# Altium PCB CPU.PcbDoc (part 2 of 2)
Units mm, origin at the board's own origin, x right, y up, seen from the top; angles counter-clockwise.
Board outline 103 x 60 mm, 2 copper layers (Top Layer, Bottom Layer), stack 0.904 mm thick; 128 components, 126 nets, 552 pads, 250 vias.
Unrouted connection lines stored in the file: 10.
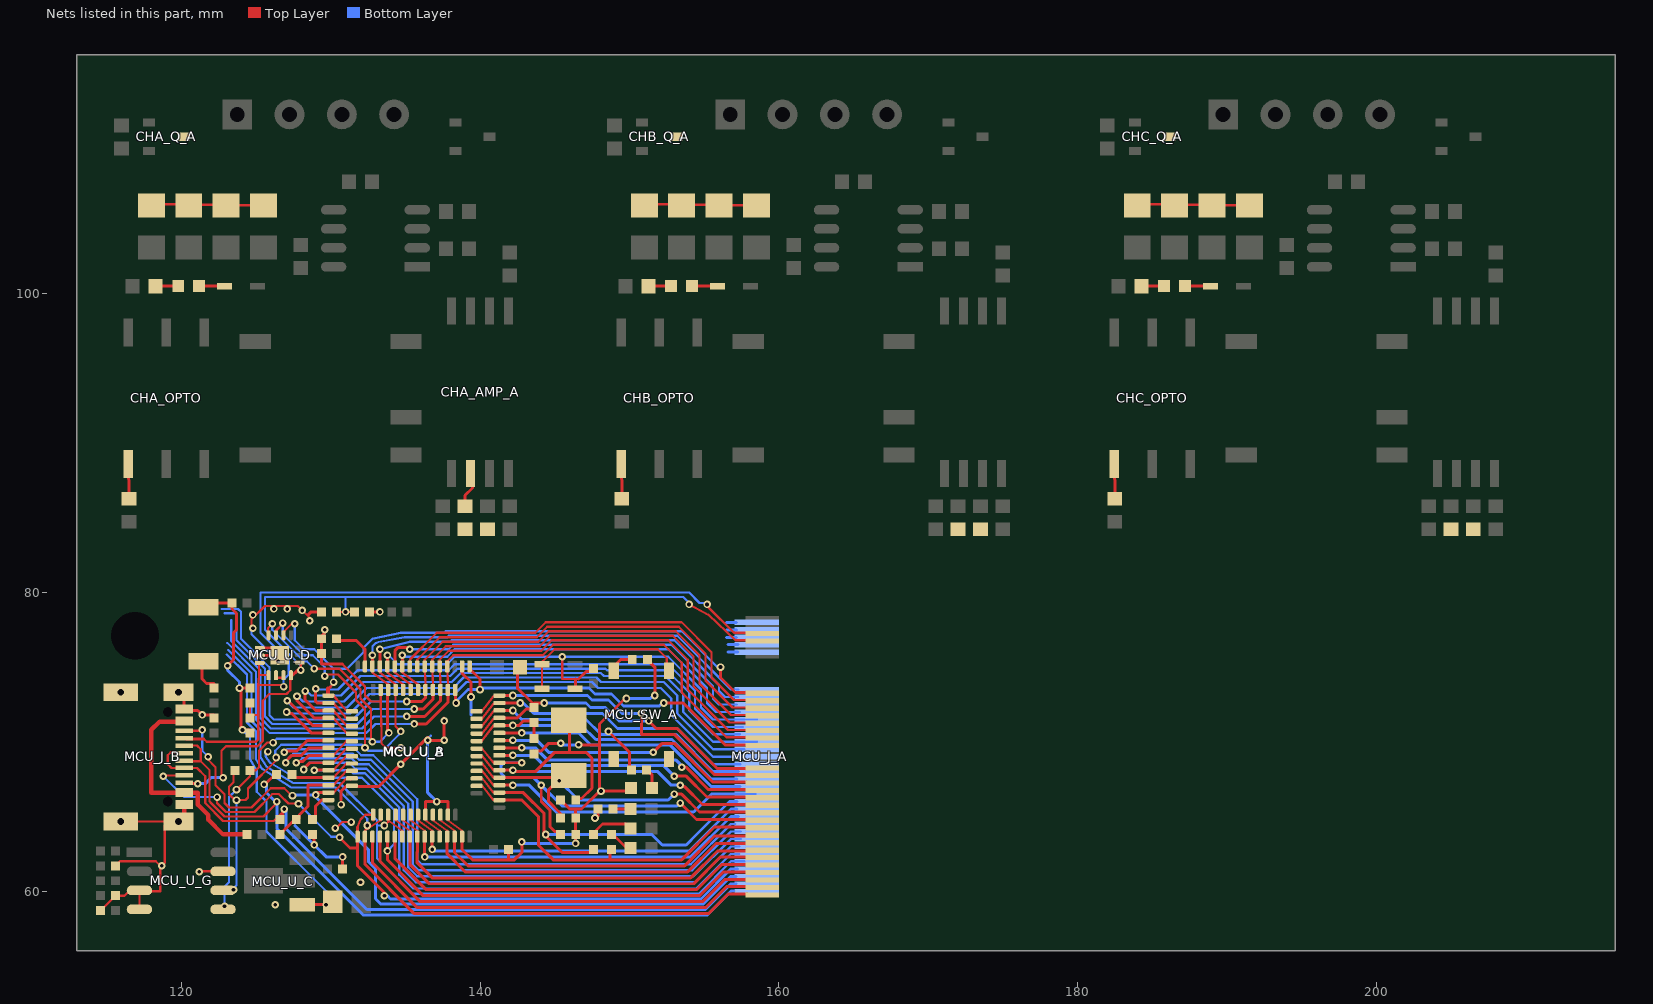
[diagram p2: the nets of this part, all layers, seen from the top]

## Via types
v1: diameter 0.508, hole 0.254, Top Layer to Bottom Layer, tented both sides, 250 vias

## Nets (pads, with @x,y where several pads share a name; then routed paths per layer and width w, separated by ;. In a path a pad name is that pad's centre, name@x,y a point inside that pad or via, vN(x,y) a via of type N, cw(c..) or ccw(c..) an arc to the next point about the centre after c; other vN are vias at no path point) (continued)
MCU_GND: MCU_C_A.2 MCU_C_B.2 MCU_C_C.2 MCU_C_D.2 MCU_C_E.2 MCU_C_G.1 MCU_C_H.1 MCU_C_I.2 MCU_C_K.2 MCU_C_L.1 MCU_C_M.2 MCU_C_N.2 MCU_C_P.1 MCU_C_R.1 MCU_D_C.2 MCU_J_A.2 MCU_J_A.4 MCU_J_A.6 MCU_J_A.8 MCU_J_A.10 MCU_J_B.0 MCU_J_B.A1_B12 MCU_J_B.A12_B1 MCU_LED_Y.1 MCU_R_A.2 MCU_R_C.1 MCU_R_I.2 MCU_R_J.2 MCU_R_M.2 MCU_R_N.2 MCU_U_A.18 MCU_U_A.60 MCU_U_A.63 MCU_U_B.23 MCU_U_B.35 MCU_U_B.44 MCU_U_B.47 MCU_U_C.1 MCU_U_D.0 MCU_U_D.8 MCU_U_D.9 MCU_U_G.3 MCU_U_G.4 MCU_U_G.7 | length 147.6
  Top Layer w0.15: MCU_C_P.1@114.7,58.8 115.6,59.7 MCU_R_M.2@115.608,59.7 116.2,59.7 MCU_U_G.3@116.6,60.1 ; MCU_R_N.2@115.608,61.7 115.908,62 118.3,62 118.6,61.7 118.6,60 MCU_U_G.3@117.6,60 ; MCU_J_B.0@115.957,64.67 119.77,64.67 MCU_J_B.0@120,64.9 ; MCU_U_G.4@117.2,58.9 MCU_U_G.3@117.2,60.06 ; v1(118.7,61.7) 118.9,61.9 MCU_J_B.0@118.9,64.4 ; v1@121.23,61.33 MCU_U_G.7@122.8,61.33 ; v1@124.7,77.6 124.7,78.2 125.6,79.1 127.8,79.1 v1(128.1,78.8) 128.6,78.3 v1(128.6,78.1) ; v1@130.287,64.142 130.774,64.629 v1(131.381,64.629) ; 130.8,75.2 132.3,73.7 132.3,73.1 132.7,72.7 133.35,72.7 ; MCU_U_B.23@133.35,73.475 133.35,72.7 ; 133.398,70.5 133.398,69.902 133.7,69.6 v1(134.7,69.6) ; 133.4,70.4 133.4,70.402 133.35,72.7 ; MCU_U_B.44@136.35,64.75 MCU_U_A.60@137.3,64.05 ; MCU_U_B.47@137.85,64.75 MCU_U_A.63@138.8,64.05
  Top Layer w0.2: MCU_J_B.A1_B12@120.197,72.1 120.197,73.097 MCU_J_B.0@120.3,73.2 ; MCU_J_B.A1_B12@120.3,72.1 121.1,72.1 v1@121.392,71.808 ; v1@121.3,71.8 121.308,71.808 v1@121.392,71.808 ; v1(121.4,71.8) v1@121.392,71.808 ; MCU_D_C.2@121.4,79.2 121.5,79.3 MCU_C_K.2@123.392,79.3 ; MCU_C_I.2@122.2,71.808 v1@121.392,71.808 ; v1(123.1,75.1) 123.5,75.5 123.5,77.3 123.7,77.5 123.7,78.6 123.4,78.9 MCU_C_K.2@123.4,79.1 ; MCU_C_K.2@123.392,79.1 MCU_C_K.2@123.4,79.1 ; MCU_C_K.2@123.4,79.2 MCU_C_K.2@123.4,79.1 ; MCU_C_N.2@124.6,70.8 MCU_C_N.2@124.6,70.7 ; MCU_R_I.2@124.6,73.808 124.6,73.708 124.6,73.6 124,73.6 124,70.8 v1(124.1,70.8) 124.5,70.8 MCU_C_N.2@124.6,70.7 ; MCU_U_D.8@125.085,76.279 MCU_U_D.8@125.275,76.279 126.521,76.279 MCU_U_D.0@126.6,76.2 ; MCU_U_D.9@125.275,75.779 126.421,75.779 MCU_U_D.0@126.5,75.7 ; MCU_U_C.1@127.8,59.1 v1(129.7,59.1) ; 128.5,78.5 128.7,78.7 MCU_R_J.2@129.392,78.7 ; MCU_C_E.2@128.7,63.692 128.9,63.492 v1(128.9,63.1) ; MCU_C_D.2@129.392,76.9 129.392,77.092 v1@129.6,77.3 ; MCU_C_D.2@129.4,76.9 129.4,75.2 130.8,75.2 ; MCU_C_L.1@129.7,58.8 129.9,59 MCU_C_L.1@129.9,59.1 ; 130.7,66.1 130.7,66.7 131.05,67.05 MCU_U_B.35@131.425,67.05 ; MCU_C_A.2@130.8,61.6 v1(130.8,62.3) ; MCU_U_B.35@131.4,67 133.2,67 v1(134.7,68.5) 136.5,70.3 v1@136.7,70.1 ; MCU_C_M.2@132.508,78.7 MCU_C_M.2@132.608,78.7 v1@133.2,78.7 ; MCU_U_B.44@136.35,65.3 136.35,66 v1(137.1,66) 137.85,66 MCU_U_B.47@137.85,65.125 ; v1(136.5,70.1) v1@136.7,70.1 ; MCU_U_A.63@138.8,63.65 138.8,62.8 139.5,62.1 141.9,62.1 ; MCU_U_A.18@138.8,75.05 138.8,74.6 139.4,74 v1@139.4,73.2 ; MCU_C_C.2@141.908,62.8 141.9,62.792 141.9,62.1 ; v1(142.8,63.3) 142.8,62.6 142.3,62.1 141.9,62.1 ; MCU_R_C.1@143.6,69.392 144.092,69.392 144.6,69.9 v1(145.4,69.9) ; MCU_C_H.1@145.5,66.1 145.5,66 146,65.5 146.4,65.5 ; v1(146.4,63.2) 146.4,64.5 146.408,64.5 ; MCU_C_G.1@146.4,65 146.4,65.5 ; 146.408,64.1 146.408,64.5 ; MCU_C_G.1@146.408,65.108 MCU_C_G.1@146.408,64.9 146.408,64.5 ; v1@146.5,69.8 v1(146.6,69.8) 148,69.8 ; v1(148.1,66.7) MCU_LED_Y.1@150,66.7 ; v1@149.8,73 148,71.2 148,69.8 ; MCU_R_A.2@151.2,75.5 151.7,75 v1(151.7,73.1) ; MCU_C_N.2@124.6,70.7 124.604,70.696 124.6,70.692 MCU_C_N.2@124.6,70.7 ; v1@136.7,70.1 v1(137.6,70.1) v1(137.6,71.4) ; v1(137.6,71.4) 137.6,71.6 137.5,71.5 v1(137.6,71.4) ; 146.4,65.5 146.8,65.5 148,66.7 148,69.8
  Top Layer w0.3: MCU_J_B.A12_B1@120.197,65.9 120.197,65.003 MCU_J_B.0@120.3,64.9
  Bottom Layer w0.15: v1(124.1,70.8) 124.6,70.3 124.6,68.836 125.05,68.1 125.05,66.65 125.7,66 125.7,64 129.7,60 v1(129.7,59.1) v1@129.7,59 ; v1@124.7,77.6 124.7,77.2 v1(126.5,75.4) ; 136.7,70.4 136.5,70.2 v1(136.5,70.1) v1(137.6,70.1)
  Bottom Layer w0.2: v1(123.1,75.1) 123.1,74.8 123.9,74 v1(123.9,73.6) ; 127.6,64.4 v1(128.9,63.1) 129.7,62.3 130.7,62.3 130.8,62.4 v1(130.8,62.3) ; v1(136.5,70.1) 136.5,66.6 v1(137.1,66) v1@137,65.9 ; 139.4,71.8 v1(139.4,73) ; v1(142.8,63.3) 142.9,63.2 v1(146.4,63.2) ; v1(145.4,69.9) 145.5,69.8 v1(146.6,69.8) ; v1(149.8,72.9) 151.4,72.9 v1@151.6,73.1 ; 156.503,77 MCU_J_A.6@157.173,77 ; 156.503,77.5 MCU_J_A.4@157.173,77.5 ; 156.503,78 MCU_J_A.2@157.173,78 ; 156.603,76 MCU_J_A.10@157.273,76 ; 156.603,76.5 MCU_J_A.8@157.273,76.5
  other v1: 126.3,59.1 132,60.6 121.2,61.3 130.315,64.227 130.7,65.8 129.6,77.5 124.8,77.6 124.8,78.5 133.3,78.7 126.2,78.9 127.1,78.9
MCU_NRST: MCU_C_R.2 MCU_J_A.55 MCU_U_A.7 MCU_U_B.7 | length 26.3
  Top Layer w0.15: MCU_U_B.7@140.15,69.55 MCU_U_A.7@140.9,68.6
  Top Layer w0.2: MCU_U_A.7@141.3,68.6 v1(142.8,68.6) ; v1(144.1,67.1) 144.1,66 144.7,65.4 144.7,64.3 145,64 MCU_C_R.2@145.292,64 ; v1@153.5,65.8 154.5,64.8 MCU_J_A.55@157.8,64.8
  Bottom Layer w0.2: v1@142.9,68.6 v1(142.8,68.6) 141.6,68.6 141.4,68.4 141.4,67.9 141.7,67.6 143.6,67.6 v1(144.1,67.1) 145.5,65.7 153.2,65.7 v1(153.4,65.9)
MCU_PA0: MCU_J_A.42 MCU_LED_R_Y.1 MCU_U_A.14 MCU_U_B.10 | length 22.5
  Top Layer w0.15: MCU_U_B.10@140.1,71 MCU_U_A.14@140.9,72.05
  Top Layer w0.2: MCU_U_A.14@141.05,72.1 MCU_U_A.14@141.292,72.1 v1(142.2,72.1) v1@142.3,72.1 ; v1(148.6,70.7) 150,69.3 MCU_LED_R_Y.1@150,68.1
  Bottom Layer w0.2: v1(142.2,72.1) 142.8,71.5 147.1,71.5 148.1,70.5 153.1,70.5 155.6,68 MCU_J_A.42@157.3,68
MCU_PA1: MCU_J_A.40 MCU_U_A.15 MCU_U_B.11 | length 19.3
  Top Layer w0.15: MCU_U_B.11@140.1,71.5 MCU_U_A.15@140.9,72.55
  Top Layer w0.2: MCU_U_A.15@141.05,72.6 MCU_U_A.15@141.292,72.6 v1(142.7,72.6) v1@142.8,72.6
  Bottom Layer w0.2: v1@142.9,72.6 143.6,71.9 148.2,71.9 149.2,70.9 153.2,70.9 155.6,68.5 MCU_J_A.40@157.4,68.5
MCU_PA2: MCU_J_A.43 MCU_U_A.16 MCU_U_B.12 | length 21.3
  Top Layer w0.15: MCU_U_B.12@140.1,72 MCU_U_A.16@140.9,73.05
  Top Layer w0.2: MCU_U_A.16@141.15,73.1 MCU_U_A.16@141.292,73.1 v1(142.2,73.1) v1@142.3,73.1 ; v1(150.8,71.9) 150.8,70.5 153,70.5 155.7,67.8 MCU_J_A.43@157.9,67.8
  Bottom Layer w0.2: v1(142.2,73.1) 147.2,73.1 147.5,72.8 148.6,72.8 149.5,71.9 v1(150.8,71.9) v1@150.9,71.9
MCU_PA3: MCU_J_A.35 MCU_U_A.17 MCU_U_B.13 | length 24.4
  Top Layer w0.2: MCU_U_B.13@138.35,73.475 138.35,72.65 v1(138.4,72.6) ; MCU_U_A.17@139.3,75.05 139.3,74.9 140,74.2 v1(140,73.5) ; v1(152.3,72.6) 153.6,72.6 156.4,69.8 MCU_J_A.35@158,69.8
  Bottom Layer w0.2: v1@138.4,72.7 139.2,73.5 v1(140,73.5) 140.1,73.6 147.3,73.6 147.7,73.2 148.8,73.2 149.6,72.4 152,72.4 152.2,72.6 v1(152.3,72.6)
MCU_PA4: MCU_J_A.33 MCU_U_A.20 MCU_U_B.14 | length 46.7
  Top Layer w0.15: MCU_U_A.20@137.8,75.05 MCU_U_B.14@137.85,73.8 ; MCU_U_A.20@137.8,75.2 137.8,75.4 138.2,75.8 144.2,75.8 144.9,76.5 152.3,76.5 153.5,75.3 153.5,73.3 156.5,70.3 MCU_J_A.33@158,70.3
  Top Layer w0.2: v1(135.6,71.2) 136.4,71.2 137.85,72.65 MCU_U_B.14@137.85,73.475
  Bottom Layer w0.15: 123.075,76.625 125,74.7 125,71.5 125.9,70.6 132.4,70.6 133,71.2 v1(135.6,71.2)
MCU_PA5: MCU_J_A.31 MCU_U_A.21 MCU_U_B.15 | length 47.8
  Top Layer w0.15: MCU_U_A.21@137.3,74.95 MCU_U_A.21@137.3,75.05 ; MCU_U_B.15@137.35,73.8 MCU_U_A.21@137.3,75.05 ; MCU_J_A.31@157.9,70.8 156.6,70.8 153.9,73.5 153.9,75.5 152.6,76.8 144.8,76.8 144.1,76.1 137.9,76.1 137.3,75.5 MCU_U_A.21@137.3,75.05
  Top Layer w0.2: v1(135.1,71.7) 136.3,71.7 137.35,72.75 MCU_U_B.15@137.35,73.475
  Bottom Layer w0.15: 123.35,78.15 123.35,76.75 125.3,74.8 125.3,71.6 126,70.9 132.1,70.9 132.9,71.7 v1(135.1,71.7)
MCU_PA6: MCU_J_A.29 MCU_U_A.22 MCU_U_B.16 | length 48.7
  Top Layer w0.15: MCU_U_A.22@136.8,74.95 MCU_U_A.22@136.8,75.05 ; MCU_U_B.16@136.85,73.75 MCU_U_A.22@136.8,75.05 ; MCU_J_A.29@158.1,71.3 156.7,71.3 154.3,73.7 154.3,75.697 152.897,77.1 144.7,77.1 144,76.4 137.7,76.4 136.8,75.5 MCU_U_A.22@136.8,75.05
  Top Layer w0.2: v1@135.5,72.3 v1(135.6,72.2) 136.2,72.2 136.85,72.85 MCU_U_B.16@136.85,73.475
  Bottom Layer w0.15: 122.9,78.6 123.6,78.6 123.7,78.5 123.7,76.8 125.6,74.9 125.6,71.7 126.1,71.2 131.8,71.2 132.8,72.2 v1(135.6,72.2)
MCU_PA7: MCU_J_A.27 MCU_U_A.23 MCU_U_B.17 | length 48.7
  Top Layer w0.15: MCU_U_A.23@136.3,74.95 MCU_U_A.23@136.3,75.05 ; MCU_U_B.17@136.35,73.8 MCU_U_A.23@136.3,75.05 ; MCU_J_A.27@158.2,71.8 156.8,71.8 156,72.6 154.7,73.9 154.7,75.8 153.1,77.4 144.6,77.4 143.9,76.7 137.5,76.7 136.3,75.5 MCU_U_A.23@136.3,75.05
  Top Layer w0.2: v1(135.1,72.7) 136.1,72.7 136.35,72.95 MCU_U_B.17@136.35,73.475
  Bottom Layer w0.15: 122.7,78.9 123.8,78.9 124,78.7 124,76.9 125.9,75 125.9,71.8 126.2,71.5 131.5,71.5 132.7,72.7 v1(135.1,72.7)
MCU_PA8: MCU_J_A.60 MCU_U_A.41 MCU_U_B.29 | length 40.6
  Top Layer w0.15: MCU_U_A.41@130.2,69.1 MCU_U_B.29@131.05,70.05
  Top Layer w0.2: v1@127.6,68.6 v1(127.7,68.6) 127.8,68.7 128.15,68.7 128.55,69.1 MCU_U_A.41@129.85,69.1 MCU_U_A.41@129.95,69.1
  Bottom Layer w0.15: v1@127.6,68.6 v1(127.7,68.6) 127.75,68.55 128.1,68.9 131.4,68.9 131.8,68.5 132.55,68.5 135.2,65.85 135.2,61.6 135.8,61 154.3,61 156.8,63.5 MCU_J_A.60@157.45,63.5
MCU_PA9: MCU_J_A.62 MCU_U_A.42 MCU_U_B.30 | length 39.6
  Top Layer w0.15: MCU_U_A.42@130.2,68.6 MCU_U_B.30@131.05,69.55
  Top Layer w0.2: v1@128.1,68.2 128.2,68.2 128.6,68.6 MCU_U_A.42@129.85,68.6 MCU_U_A.42@130.05,68.6
  Bottom Layer w0.15: v1(128.2,68.15) 128.2,68.2 128.6,68.6 131.25,68.6 131.65,68.2 132.4,68.2 134.9,65.7 134.9,61.4 135.7,60.6 154.4,60.6 156.8,63 MCU_J_A.62@157.35,63
MCU_PA10: MCU_J_A.64 MCU_U_A.43 MCU_U_B.31 | length 37.8
  Top Layer w0.15: MCU_U_A.43@130.2,68.1 MCU_U_B.31@131.05,69.05
  Top Layer w0.2: v1(128.9,68.1) MCU_U_A.43@129.85,68.1 MCU_U_A.43@130.1,68.1
  Bottom Layer w0.15: v1(128.9,68.1) 131.3,68.1 131.5,67.9 132.3,67.9 134.6,65.6 134.6,61.1 135.51,60.19 154.49,60.19 156.8,62.5 MCU_J_A.64@157.35,62.5
MCU_PA15: MCU_J_A.75 MCU_U_A.50 MCU_U_B.38 | length 48.2
  Top Layer w0.15: MCU_U_A.50@132.3,64.05 132.531,64.204 132.565,64.227 133.35,64.75 MCU_U_B.38@133.35,65.125
  Top Layer w0.2: MCU_U_A.50@132.3,63.5 132.3,61.8 135.6,58.5 155.3,58.5 156.6,59.8 MCU_J_A.75@157.9,59.8
  Bottom Layer w0.15: 123.05,75.85 124.4,74.5 124.4,71.3 125,70.7 125,68.818 125.4,68.2 127.35,66.95 130.35,66.95 132.45,64.85 v1(132.45,64.4)
MCU_PB0: MCU_J_A.26 MCU_U_A.26 MCU_U_B.18 | length 27.8
  Top Layer w0.15: MCU_U_A.26@134.8,74.65 135.85,73.85 MCU_U_B.18@135.85,73.475
  Top Layer w0.2: MCU_U_A.26@134.8,74.9 v1(134.8,75.8)
  Bottom Layer w0.15: v1(134.8,75.8) 134.9,75.7 137.8,75.7 138.3,76.2 152.6,76.2 155.2,73.6 155.2,72.6 155.8,72 MCU_J_A.26@157.4,72
MCU_PB1: MCU_J_A.24 MCU_U_A.27 MCU_U_B.19 | length 27.6
  Top Layer w0.15: MCU_U_A.27@134.3,74.65 MCU_U_B.19@135.35,73.85
  Top Layer w0.2: MCU_U_A.27@134.3,75 134.3,76.084 134.294,76.09 134.5,76.3 v1@135.2,76.3
  Bottom Layer w0.15: v1(135.3,76.2) 137.9,76.2 138.2,76.5 152.8,76.5 155.6,73.7 155.6,72.9 156,72.5 MCU_J_A.24@157.2,72.5
MCU_PB2: MCU_D_A.2 MCU_J_A.28 MCU_R_B.2 MCU_U_A.28 MCU_U_B.20 | length 34.5
  Top Layer w0.15: MCU_U_A.28@133.8,74.65 MCU_U_B.20@134.85,73.85 ; v1(145.5,75.7) 145.5,74.2 146.4,74.2 146.6,74.2
  Top Layer w0.2: MCU_U_A.28@133.8,75.1 133.806,75.106 133.806,75.694 v1@133.8,75.7 ; 133.8,75.5 v1@133.8,75.7 ; v1(133.8,75.8) v1@133.8,75.7 ; MCU_D_A.2@146.4,73.6 146.4,74.2 ; 146.6,74.2 147.1,74.7 MCU_R_B.2@147.6,74.7
  Bottom Layer w0.15: v1(133.8,75.8) 133.9,75.8 134.5,75.2 137.8,75.2 138.3,75.7 v1(145.5,75.7) 152.6,75.7 154.8,73.5 ; 154.6,73.7 154.8,73.5 ; MCU_J_A.28@158.525,71.5 155.6,71.5 154.8,72.3 154.8,73.5
MCU_PB3: MCU_J_A.66 MCU_U_A.55 MCU_U_B.39 | length 49.1
  Top Layer w0.15: v1(133.6,64.4) 133.85,64.65 MCU_U_B.39@133.85,64.75 ; MCU_U_B.39@133.85,65.125 MCU_U_B.39@133.85,64.75 ; MCU_U_A.55@134.8,64.05 MCU_U_B.39@133.85,64.75
  Bottom Layer w0.15: 123.15,76.15 124.7,74.6 124.7,71.4 125.3,70.8 125.3,68.968 125.7,68.35 127.5,67.25 130.6,67.25 133.1,64.75 133.1,64.45 ; v1(133.6,64.4) 133.15,64.4 133.1,64.45 ; MCU_J_A.66@157.7,62 156.8,62 154.638,59.838 135.462,59.838 133.1,62.2 133.1,64.45
MCU_PB4: MCU_J_A.65 MCU_U_A.56 MCU_U_B.40 | length 27.1
  Top Layer w0.15: MCU_U_B.40@134.35,64.75 MCU_U_A.56@135.3,64.05
  Top Layer w0.2: MCU_U_A.56@135.3,63.75 135.3,61.8 136.6,60.5 154.3,60.5 156.1,62.3 MCU_J_A.65@158,62.3
MCU_PB5: MCU_J_A.63 MCU_U_A.57 MCU_U_B.41 | length 26.4
  Top Layer w0.15: MCU_U_B.41@134.85,64.75 MCU_U_A.57@135.8,64.05
  Top Layer w0.2: MCU_U_A.57@135.8,63.75 135.8,62.616 135.794,62.61 135.794,61.906 136.8,60.9 154.1,60.9 155.9,62.7 MCU_J_A.63@158,62.7
MCU_PB6: MCU_J_A.54 MCU_U_A.58 MCU_U_B.42 | length 24.8
  Top Layer w0.15: MCU_U_B.42@135.35,64.75 MCU_U_A.58@136.3,64.05 ; MCU_U_A.58@136.3,63.65 MCU_U_A.58@136.3,63.75
  Top Layer w0.2: v1(136.3,62.3) MCU_U_A.58@136.3,63.75
  Bottom Layer w0.2: v1(136.3,62.3) 154.1,62.3 156.8,65 MCU_J_A.54@157.3,65
MCU_PB7: MCU_J_A.52 MCU_U_A.59 MCU_U_B.43 | length 24.3
  Top Layer w0.15: MCU_U_B.43@135.85,64.75 MCU_U_A.59@136.8,64.05 ; MCU_U_B.43@135.85,65.125 MCU_U_B.43@135.9,64.8
  Top Layer w0.2: v1(136.8,62.8) MCU_U_A.59@136.8,63.65 MCU_U_A.59@136.8,63.85
  Bottom Layer w0.2: v1@136.8,62.7 v1(136.8,62.8) 136.9,62.7 154,62.7 156.8,65.5 MCU_J_A.52@157.2,65.5
MCU_PB8: MCU_J_A.61 MCU_U_A.61 MCU_U_B.45 | length 24.1
  Top Layer w0.15: MCU_U_B.45@136.85,65.125 136.85,64.75 MCU_U_A.61@137.8,64.05
  Top Layer w0.2: MCU_U_A.61@137.8,63.5 137.8,62.5 139,61.3 153.9,61.3 155.8,63.2 MCU_J_A.61@158.1,63.2
MCU_PB9: MCU_J_A.59 MCU_U_A.62 MCU_U_B.46 | length 23.9
  Top Layer w0.15: MCU_U_B.46@137.35,65.125 137.35,64.75 MCU_U_A.62@138.3,64.05
  Top Layer w0.2: MCU_U_A.62@138.3,63.95 MCU_U_A.62@138.3,63.65 138.3,62.6 139.2,61.7 153.7,61.7 155.7,63.7 MCU_J_A.59@158.1,63.7
MCU_PB10: MCU_J_A.22 MCU_R_P.1 MCU_U_A.29 MCU_U_B.21 MCU_U_D.6 MCU_U_G.6 | length 66.5
  Top Layer w0.15: v1@123.6,66.1 123.2,66.5 123.2,67 123.5,67.3 123.5,67.992 MCU_R_P.1@123.6,68.092 ; v1@123.8,66.1 124.3,66.1 124.475,66.275 124.475,66.875 126.4,68.8 126.25,68.95 v1(126.35,68.95) ; MCU_U_D.6@126.35,77.315 126.35,77.45 v1@126.8,77.9 ; v1@129.5,74.3 129.7,74.5 130.5,74.5 131.7,73.3 131.7,72.8 132.1,72.4 132.3,72.2 v1(132.3,69.6) v1@132.3,69.5 ; MCU_U_A.29@133.3,74.65 MCU_U_B.21@134.35,73.85 ; MCU_U_B.21@134.35,73.475 MCU_U_B.21@134.35,73.2 ; MCU_U_B.21@134.4,73.25 MCU_U_B.21@134.35,73.2 ; v1@134.6,70.8 134.35,71.05 MCU_U_B.21@134.35,73.2
  Top Layer w0.2: MCU_U_A.29@133.25,75 MCU_U_A.29@133.3,75.05 v1(133.3,76.2)
  Bottom Layer w0.15: v1(123.5,60.1) 123.45,60.15 123.7,60.4 123.7,60.6 123.7,60.8 v1(123.7,66.1) ; v1(126.35,68.95) 126.3,69 126.3,69.4 126.7,69.8 132.1,69.8 v1(132.3,69.6) ; v1@126.8,77.9 126.8,77.2 128.2,75.8 128.8,75.8 129.6,75 v1(129.6,74.4) ; v1@132.3,69.5 v1(132.3,69.6) ; v1(133.3,76.2) 135.3,76.7 138,76.7 138.1,76.8 153,76.8 156,73.8 156,73.4 156.4,73 MCU_J_A.22@157.3,73 ; v1@134.6,70.6 134.6,70.5 133.5,69.4 132.5,69.4 v1(132.3,69.6)
  other v1: 134.7,70.7 126.8,77.95
MCU_PB11: MCU_J_A.20 MCU_R_Q.1 MCU_U_A.30 MCU_U_B.22 MCU_U_D.7 MCU_U_G.5 | length 65
  Top Layer w0.15: v1@123.8,66.9 124.6,67.7 MCU_R_Q.1@124.6,68.092 ; MCU_R_Q.1@124.7,68.1 125,68.1 125.2,68.3 125.2,69.4 125.75,69.95 v1(126.15,69.95) ; MCU_U_D.7@125.8,77.2 125.8,77.6 v1(126.1,77.9) ; v1(128.9,74.9) 130.6,74.9 132,73.5 132,72.9 132.7,72.2 v1@132.7,69.9 ; MCU_U_A.30@132.8,74.65 MCU_U_B.22@133.85,73.85
  Top Layer w0.2: MCU_U_A.30@132.8,75.3 v1(132.8,75.8) ; v1@133.8,70.5 133.8,73.425 MCU_U_B.22@133.85,73.475
  Bottom Layer w0.15: v1(122.9,59) 122.9,60.3 123.2,60.6 123.2,60.8 123.2,61.4 123.2,66.3 v1(123.7,66.8) ; v1(126.1,77.9) 126.1,77.5 128.2,75.4 128.4,75.4 v1(128.9,74.9) ; v1(126.15,69.95) 126.15,70.05 126.2,70 126.4,70.2 132.6,70.2 v1(132.8,70) 133.3,70 v1(133.9,70.6) ; v1(132.8,75.8) 132.8,76.4 133,76.6 133.206,76.686 134.946,77 137.8,77 137.9,77.1 153.2,77.1 156.8,73.5 MCU_J_A.20@157.3,73.5
MCU_PB12: MCU_J_A.21 MCU_U_A.33 MCU_U_B.25 MCU_U_D.5 | length 40.3
  Top Layer w0.15: MCU_U_D.5@126.85,77.315 126.9,77.365 126.9,77.4 v1@127.4,77.9 ; MCU_U_A.33@130.2,73.1 MCU_U_B.25@131.05,72.1
  Top Layer w0.2: MCU_U_A.33@129.8,73.1 129.8,73.5 ; 129.8,73.6 129.8,73.5 ; MCU_U_A.33@129.85,73.1 129.85,73.55 ; 129.85,73.6 129.85,73.55 ; v1(130.2,74) 130.2,73.9 129.85,73.55 ; v1(156.1,75) 156.1,74.3 157.1,73.3 MCU_J_A.21@158.2,73.3 ; 129.8,73.5 129.85,73.55
  Bottom Layer w0.15: v1(127.6,77.9) 127.6,76.8 128.2,76.2 128.9,76.2 130.2,74.9 ; v1(130.2,74) 130.2,74.9 ; v1@156,74.9 153.5,77.4 137.7,77.4 137.6,77.3 134.7,77.3 132.8,76.9 132.2,76.3 132.2,76 131.1,74.9 130.2,74.9
MCU_PB13: MCU_J_A.30 MCU_U_A.34 MCU_U_B.26 | length 35.4
  Top Layer w0.15: MCU_U_A.34@130.2,72.6 MCU_U_B.26@131.05,71.6
  Top Layer w0.2: v1(129,73.55) 129,72.7 129.1,72.6 MCU_U_A.34@129.85,72.6 MCU_U_A.34@130.15,72.6
  Bottom Layer w0.15: v1(129,73.55) 128.9,73.55 128.85,73.5 130.5,73.5 131.8,74.8 137.9,74.8 138.3,75.2 152.6,75.2 154.4,73.4 154.4,72.2 155.6,71 MCU_J_A.30@157.6,71
MCU_PB14: MCU_J_A.32 MCU_U_A.35 MCU_U_B.27 | length 36.8
  Top Layer w0.15: MCU_U_A.35@130.2,72.1 MCU_U_B.27@131.096,71.046
  Top Layer w0.2: v1(128.3,73.4) 128.3,72.8 129,72.1 MCU_U_A.35@129.85,72.1 MCU_U_A.35@129.95,72.1
  Bottom Layer w0.15: v1(128.3,73.4) 128.3,73.5 v1@128.25,73.55 ; MCU_J_A.32@157.4,70.5 155.6,70.5 154,72.1 154,73.3 152.5,74.8 148.5,74.8 148.4,74.9 138.5,74.9 138,74.4 132,74.4 130.7,73.1 128.7,73.1 v1@128.275,73.525 ; v1@128.25,73.55 128.25,73.5 v1@128.275,73.525 ; v1@128.25,73.55 v1@128.275,73.525
MCU_PB15: MCU_J_A.34 MCU_U_A.36 MCU_U_B.28 | length 38.9
  Top Layer w0.15: MCU_U_A.36@130.2,71.6 MCU_U_B.28@131.096,70.546
  Top Layer w0.2: v1@127.75,73.15 v1(127.75,73.05) 127.75,72.75 128.9,71.6 MCU_U_A.36@129.85,71.6 MCU_U_A.36@130.05,71.6
  Bottom Layer w0.15: v1(127.75,73.05) 127.8,73.05 128.15,72.7 130.9,72.7 132.2,74 138.1,74 138.7,74.6 148.1,74.6 148.3,74.4 152.4,74.4 153.6,73.2 153.6,72 155.6,70 MCU_J_A.34@158.525,70
MCU_PC0: MCU_J_A.49 MCU_U_A.8 | length 18.4
  Top Layer w0.2: MCU_U_A.8@141.05,69.1 MCU_U_A.8@141.292,69.1 v1(142.2,69.1) v1@142.3,69.1 ; v1@152.9,67.6 v1(153,67.7) 153.8,67.7 155.2,66.3 MCU_J_A.49@158.1,66.3
  Bottom Layer w0.2: v1@142.3,69.1 143.6,69.1 144.3,68.4 152.3,68.4 v1(153,67.7)
MCU_PC1: MCU_J_A.47 MCU_U_A.9 | length 17.8
  Top Layer w0.2: MCU_U_A.9@141.15,69.6 MCU_U_A.9@141.292,69.6 v1(142.8,69.6) ; v1@153.5,68.4 v1(153.5,68.3) 153.8,68.3 155.3,66.8 MCU_J_A.47@157.9,66.8
  Bottom Layer w0.2: v1@143,69.6 143.7,69.6 144.5,68.8 153.1,68.8 153.4,68.5 v1@153.4,68.3
MCU_PC2: MCU_J_A.45 MCU_U_A.10 | length 18.3
  Top Layer w0.2: MCU_U_A.10@141.05,70.1 MCU_U_A.10@141.292,70.1 v1(142.2,70.1) v1@142.3,70.1 ; v1@151.7,69.4 152.2,69.9 153,69.9 155.6,67.3 MCU_J_A.45@157.8,67.3
  Bottom Layer w0.2: v1@142.3,70.1 143.8,70.1 144.6,69.3 v1(151.6,69.3)
MCU_PC3: MCU_J_A.46 MCU_U_A.11 | length 17.8
  Top Layer w0.2: MCU_U_A.11@141.05,70.6 MCU_U_A.11@141.292,70.6 v1(142.8,70.6) v1@142.9,70.6
  Bottom Layer w0.2: v1@142.9,70.6 146.6,70.6 147.4,69.8 152.7,69.8 155.5,67 MCU_J_A.46@157.4,67
MCU_PC4: MCU_J_A.25 MCU_U_A.24 | length 27.1
  Top Layer w0.15: MCU_U_A.24@135.8,74.95 MCU_U_A.24@135.8,75.05 135.8,75.5 137.3,77 143.8,77 144.5,77.7 153.298,77.7 155.098,75.9 155.1,75.9 155.1,74.1 156.9,72.3 MCU_J_A.25@158.1,72.3
MCU_PC5: MCU_J_A.23 MCU_U_A.25 | length 27.6
  Top Layer w0.15: MCU_U_A.25@135.3,74.95 135.306,74.956 135.306,75.506 137.1,77.3 143.7,77.3 144.4,78 153.497,78 155.497,76 155.5,76 155.5,74.3 156.8,73 157,72.8 MCU_J_A.23@158.2,72.8
MCU_PC6: MCU_J_A.36 MCU_U_A.37 | length 37.7
  Top Layer w0.2: v1@127.125,72.775 127.6,72.3 128.8,71.1 128.9,71.1 129.1,71.1 MCU_U_A.37@129.75,71.1
  Bottom Layer w0.15: v1(127.1,72.75) 127.05,72.75 127.5,72.3 131.1,72.3 132.4,73.6 138.2,73.6 138.9,74.3 147.8,74.3 148.1,74 152.3,74 153.2,73.1 153.2,71.9 155.6,69.5 MCU_J_A.36@157.7,69.5
MCU_PC7: MCU_J_A.38 MCU_U_A.38 | length 37.8
  Top Layer w0.2: v1(127.05,72) 127.05,71.85 127.1,71.9 127.4,71.9 128.7,70.6 MCU_U_A.38@129.85,70.6 MCU_U_A.38@130.15,70.6
  Bottom Layer w0.15: v1(127.05,72) 127.05,71.85 127.1,71.9 131.3,71.9 132.6,73.2 138.3,73.2 139.1,74 147.5,74 147.9,73.6 152.1,73.6 152.8,72.9 152.8,71.8 155.6,69 MCU_J_A.38@157.3,69
MCU_PC8: MCU_J_A.56 MCU_U_A.39 | length 40.3
  Top Layer w0.2: v1(126.9,69.3) 127,69.4 127.75,69.4 128.45,70.1 MCU_U_A.39@129.85,70.1 MCU_U_A.39@129.95,70.1
  Bottom Layer w0.15: v1(126.9,69.3) 127.1,69.5 131.65,69.5 132.05,69.1 132.85,69.1 135.8,66.15 135.8,62.1 136.1,61.8 154.1,61.8 156.8,64.5 MCU_J_A.56@157.1,64.5
MCU_PC9: MCU_J_A.58 MCU_U_A.40 | length 41
  Top Layer w0.2: v1(127,68.6) 126.95,68.65 127.4,69.1 128.05,69.1 128.55,69.6 MCU_U_A.40@129.85,69.6 MCU_U_A.40@129.95,69.6
  Bottom Layer w0.15: v1(127,68.6) 126.95,68.65 127.5,69.2 131.5,69.2 131.9,68.8 132.7,68.8 135.5,66 135.5,61.8 135.9,61.4 154.2,61.4 156.8,64 MCU_J_A.58@157.45,64
MCU_PC10: MCU_J_A.73 MCU_U_A.51 | length 28.8
  Top Layer w0.2: MCU_U_A.51@132.8,63.75 MCU_U_A.51@132.8,63.65 132.8,62.8 132.8,61.9 135.8,58.9 155.1,58.9 156.5,60.3 MCU_J_A.73@157.9,60.3
MCU_PC11: MCU_J_A.71 MCU_U_A.52 | length 28.1
  Top Layer w0.2: MCU_U_A.52@133.3,63.75 MCU_U_A.52@133.3,63.65 133.3,62 136,59.3 154.9,59.3 156.4,60.8 MCU_J_A.71@157.9,60.8
MCU_PC12: MCU_J_A.69 MCU_U_A.53 | length 40.6
  Top Layer w0.2: MCU_U_A.53@133.8,63.75 MCU_U_A.53@133.8,63.65 133.8,62.55 133.8,62.1 136.2,59.7 154.7,59.7 156.3,61.3 MCU_J_A.69@157.9,61.3
  Bottom Layer w0.15: v1@125.65,69.3 125.65,69.05 125.95,68.6 127.6,67.6 132.1,67.6 134.25,65.45 134.25,63.15 v1(133.8,62.7)
  other v1: 125.8,69.35
MCU_PC13: MCU_J_A.57 MCU_LED_R_G.1 MCU_U_A.2 MCU_U_B.2 | length 23.7
  Top Layer w0.15: MCU_U_B.2@140.15,67.05 MCU_U_A.2@140.9,66.1
  Top Layer w0.2: 141.9,66.1 MCU_U_A.2@141.292,66.1 141.15,66.1 142.8,66.1 143.9,65 143.9,63.1 144.9,62.1 148.7,62.1 ; MCU_LED_R_G.1@148.6,63 148.7,62.9 148.7,62.1 ; MCU_J_A.57@158.3,64.3 155.7,64.3 153.5,62.1 148.7,62.1
MCU_PC14: MCU_J_A.50 MCU_LED_R_B.1 MCU_U_A.3 MCU_U_B.3 | length 24.7
  Top Layer w0.15: MCU_U_B.3@140.15,67.55 140.9,66.6 MCU_U_A.3@141.292,66.6
  Top Layer w0.2: MCU_U_A.3@141.292,66.6 142.9,66.6 144.3,65.2 144.3,63.9 v1(144.4,63.8) ; v1@144.4,63.7 145.5,62.6 147.408,62.6 MCU_LED_R_B.1@147.6,62.792
  Bottom Layer w0.2: v1(144.4,63.8) 151.5,63.8 152.2,63.1 153.8,63.1 154.5,63.8 156.7,66 MCU_J_A.50@157.2,66
MCU_PC15: MCU_J_A.48 MCU_LED_R_R.1 MCU_U_A.4 MCU_U_B.4 | length 20.9
  Top Layer w0.15: MCU_U_B.4@140.15,68.05 MCU_U_A.4@140.9,67.1
  Top Layer w0.2: MCU_U_A.4@141.05,67.1 MCU_U_A.4@141.292,67.1 v1(142.2,67.1) v1@142.3,67.1 ; v1@147.8,64.9 147.892,64.992 MCU_LED_R_R.1@147.892,65.5
  Bottom Layer w0.2: v1@142.3,67.1 143.3,67.1 145.1,65.3 147.7,65.3 ; v1(147.7,64.9) 147.7,65.3 ; MCU_J_A.48@158.425,66.5 155.5,66.5 154.3,65.3 147.7,65.3
MCU_PD2: MCU_J_A.67 MCU_U_A.54 | length 26.8
  Top Layer w0.2: MCU_U_A.54@134.3,63.75 MCU_U_A.54@134.3,63.65 134.3,62.2 136.4,60.1 154.5,60.1 156.2,61.8 MCU_J_A.67@158,61.8
MCU_USB_CC1: MCU_C_N.1 MCU_J_A.5 MCU_J_B.A5 MCU_R_I.1 MCU_U_D.10 MCU_U_D.11 | length 58.3
  Top Layer w0.15: MCU_J_B.A5@119.9,70.2 MCU_J_B.A5@120.3,70.2 ; MCU_C_N.1@124.6,71.8 125.15,71.8 ; MCU_C_N.1@124.6,71.808 124.6,72.692 MCU_R_I.1@124.6,72.792 ; MCU_U_D.10@125.2,75.2 125.2,74.5 125.225,74.475 ; MCU_U_D.11@125.85,74.475 125.225,74.475 ; v1@126.7,73.8 125.15,73.8 ; v1(155.2,79.2) 155.3,79 157,77.3 157.1,77.3 ; MCU_J_A.5@158,77.3 157.1,77.3 ; MCU_J_A.5@158.9,77.25 157.1,77.3 ; MCU_J_B.A5@120.3,70.2 121.5,70.2 121.525,70.175 ; MCU_J_B.A5@120.3,70.2 120.325,70.175 121.525,70.175 ; 121.525,70.175 121.7,70 125,70 125.15,70.15 125.15,71.8 ; 125.15,71.8 125.15,73.8 ; 125.15,73.8 125.2,74.45 125.225,74.475
  Bottom Layer w0.15: v1(126.85,73.7) 126.85,74.15 127.2,74.5 127.2,75.4 125.3,77.3 125.3,80 154,80 154.7,79.3 v1@155.2,79.3
MCU_USB_CC2: MCU_C_M.1 MCU_J_A.7 MCU_J_B.B5 MCU_R_J.1 MCU_U_D.1 MCU_U_D.14 | length 56.2
  Top Layer w0.15: v1@122.7,67.6 122.7,69.4 123,69.7 125.1,69.7 125.45,70.05 125.45,72.75 125.9,73.2 127.05,73.2 127.3,73.45 127.3,74.1 127.35,74.15 MCU_U_D.14@127.35,74.285 ; MCU_R_J.1@130.408,78.7 v1(131,78.7) MCU_C_M.1@131.4,78.7 ; v1(154,79.2) 155.3,78.5 157.1,76.8 MCU_J_A.7@158.1,76.8
  Top Layer w0.2: MCU_J_B.B5@119.8,67.2 v1(121.1,67.2) ; MCU_U_D.14@127.4,74.4 127.8,74.8 v1(128,74.8) 128,75.189 MCU_U_D.1@128.115,75.304
  Bottom Layer w0.15: v1(128,74.8) 128,75.1 125.6,77.5 125.6,79.7 131,79.7 ; v1@131,78.8 131,79.7 ; v1@153.9,79.4 153.6,79.7 131,79.7
  Bottom Layer w0.2: v1(121.1,67.2) 121.6,67.2 122,67.6 v1(122.8,67.6)
MCU_VDDA: MCU_C_F.2 MCU_J_A.41 MCU_L_A.1 MCU_U_A.13 MCU_U_B.9 | length 23.2
  Top Layer w0.15: MCU_U_B.9@140.1,70.5 MCU_U_A.13@140.9,71.55
  Top Layer w0.2: MCU_U_A.13@141.15,71.6 MCU_U_A.13@141.292,71.6 142.5,71.6 143.1,72.2 143.4,72.2 MCU_C_F.2@143.5,72.3 ; MCU_L_A.1@142.8,74.7 142.5,74.7 142.5,73.6 143.508,72.592 143.508,72.6 143.6,72.508 MCU_C_F.2@143.6,72.5 ; MCU_C_F.2@143.6,72.6 v1(144.3,72.6) ; v1(151.3,71.4) 151.8,70.9 153.2,70.9 155.9,68.2 MCU_J_A.41@158,68.2
  Bottom Layer w0.2: v1(144.3,72.6) 147.1,72.6 147.4,72.3 148.4,72.3 149.3,71.4 v1(151.3,71.4)
MCU_VSSA: MCU_C_F.1 MCU_J_A.44 MCU_R_C.2 MCU_U_A.12 MCU_U_B.8 | length 21.9
  Top Layer w0.15: MCU_U_B.8@139.775,70.05 140.11,70.05 MCU_U_A.12@140.906,71.095
  Top Layer w0.2: MCU_U_A.12@141.15,71.1 MCU_U_A.12@141.292,71.1 v1(142.2,71.1) ; v1@142.4,71.1 v1(142.2,71.1) ; MCU_R_C.2@143.6,70.408 MCU_C_F.1@143.6,71.292 MCU_C_F.1@143.6,71.4 ; MCU_C_F.1@143.6,71.5 MCU_C_F.1@143.6,71.4 ; MCU_C_F.1@143.8,71.4 MCU_C_F.1@143.6,71.4 ; v1(142.2,71.1) 142.6,71.1 142.9,71.4 MCU_C_F.1@143.6,71.4
  Bottom Layer w0.2: 142.5,71.1 146.8,71.1 147.75,70.15 152.85,70.15 155.5,67.5 MCU_J_A.44@157.2,67.5
MCU_XIN: MCU_C_G.2 MCU_J_A.53 MCU_U_A.5 MCU_U_B.5 MCU_Y_A.1 | length 22.6
  Top Layer w0.15: MCU_U_B.5@140.15,68.55 MCU_U_A.5@140.9,67.6
  Top Layer w0.2: MCU_U_A.5@141.2,67.6 MCU_U_A.5@141.292,67.6 144.9,67.6 144.9,67.2 MCU_Y_A.1@145.4,67.7 ; MCU_Y_A.1@145,67.2 144.6,66.8 144.6,66 145.392,65.208 145.392,65.2 ; MCU_Y_A.1@145.492,67.092 MCU_Y_A.1@145.5,67.1 ; MCU_Y_A.1@145.7,67 MCU_Y_A.1@145.9,67.2 ; v1(153,66.5) 153.5,66.5 154.7,65.3 MCU_J_A.53@157.9,65.3
  Bottom Layer w0.2: v1(145.3,67.4) 146.6,66.1 152.6,66.1 v1(153,66.5)
MCU_XOUT: MCU_C_H.2 MCU_J_A.51 MCU_U_A.6 MCU_U_B.6 MCU_Y_A.2 | length 29.7
  Top Layer w0.15: MCU_U_B.6@140.15,69.05 MCU_U_A.6@140.9,68.1
  Top Layer w0.2: MCU_U_A.6@141.15,68.1 MCU_U_A.6@141.292,68.1 v1(142.2,68.1) 142.3,68 143.7,68 145,69.3 147.1,69.3 147.5,68.9 147.5,66.9 146.8,66.2 MCU_C_H.2@146.408,66.2 ; MCU_Y_A.2@145.292,71.4 MCU_Y_A.2@145.3,71.4 ; 146,69.4 MCU_Y_A.2@146,70.7 ; v1@153.4,67 153.7,67 154.9,65.8 MCU_J_A.51@158,65.8
  Bottom Layer w0.2: v1@142.2,68 151.9,68 152.8,67.1 v1(153.4,67.1)
NetCHA_D_A_1: CHA_D_A.1 CHA_R_D.2 | length 1.3
  Top Layer w0.2: CHA_R_D.2@118.5,100.5 CHA_D_A.1@119.8,100.5
NetCHA_D_A_2: CHA_D_A.2 CHA_D_C.1 | length 1.8
  Top Layer w0.2: CHA_D_A.2@121.2,100.5 CHA_D_C.1@122.9,100.5 CHA_D_C.1@123,100.5
NetCHA_OPTO_1: CHA_OPTO.1 CHA_R_E.2 | length 2.1
  Top Layer w0.2: CHA_OPTO.1@116.46,88.6 CHA_R_E.2@116.5,86.5
NetCHA_Q_A_3: CHA_Q_A.3 CHA_R_W.2 CHA_R_X.2 CHA_R_Y.2 CHA_R_Z.2 | length 7.5
  Top Layer w0.2: CHA_R_Y.2@118,106 118.001,106 120.501,105.967 123,105.933 CHA_R_W.2@125.5,105.9
NetCHA_R_F_1: CHA_R_F.1
NetCHA_R_G_1: CHA_R_G.1 CHB_R_G.1 CHC_R_G.1
NetCHB_D_A_1: CHB_D_A.1 CHB_R_D.2 | length 1.3
  Top Layer w0.2: CHB_R_D.2@151.5,100.5 CHB_D_A.1@152.8,100.5
NetCHB_D_A_2: CHB_D_A.2 CHB_D_C.1 | length 1.8
  Top Layer w0.2: CHB_D_A.2@154.2,100.5 CHB_D_C.1@155.9,100.5 CHB_D_C.1@156,100.5
NetCHB_OPTO_1: CHB_OPTO.1 CHB_R_E.2 | length 2.1
  Top Layer w0.2: CHB_OPTO.1@149.46,88.6 CHB_R_E.2@149.5,86.5
NetCHB_Q_A_3: CHB_Q_A.3 CHB_R_W.2 CHB_R_X.2 CHB_R_Y.2 CHB_R_Z.2 | length 7.5
  Top Layer w0.2: CHB_R_Y.2@151,106 151.001,106 153.501,105.967 156,105.933 CHB_R_W.2@158.5,105.9
NetCHB_R_F_1: CHB_R_F.1
NetCHC_D_A_1: CHC_D_A.1 CHC_R_D.2 | length 1.3
  Top Layer w0.2: CHC_R_D.2@184.5,100.5 CHC_D_A.1@185.8,100.5
NetCHC_D_A_2: CHC_D_A.2 CHC_D_C.1 | length 1.8
  Top Layer w0.2: CHC_D_A.2@187.2,100.5 CHC_D_C.1@188.9,100.5 CHC_D_C.1@189,100.5
NetCHC_OPTO_1: CHC_OPTO.1 CHC_R_E.2 | length 2.1
  Top Layer w0.2: CHC_OPTO.1@182.46,88.6 CHC_R_E.2@182.5,86.5
NetCHC_Q_A_3: CHC_Q_A.3 CHC_R_W.2 CHC_R_X.2 CHC_R_Y.2 CHC_R_Z.2 | length 7.5
  Top Layer w0.2: CHC_R_Y.2@184,106 184.001,106 186.501,105.967 189,105.933 CHC_R_W.2@191.5,105.9
NetCHC_R_F_1: CHC_R_F.1
NetMCU_C_D_1: MCU_C_D.1 MCU_U_A.31 | length 3.4
  Top Layer w0.2: MCU_C_D.1@130.3,76.8 131.7,76.8 132.3,76.2 132.3,75.6 MCU_U_A.31@132.3,75.05
NetMCU_C_E_1: MCU_C_E.1 MCU_U_A.47 | length 2.2
  Top Layer w0.2: MCU_C_E.1@128.8,64.7 129,64.7 129,65.7 129.4,66.1 MCU_U_A.47@129.85,66.1
NetMCU_D_A_1: MCU_D_A.1 MCU_D_B.1 MCU_SW_A.2 | length 11.9
  Top Layer w0.15: MCU_D_B.1@144.15,75.25 MCU_D_A.1@144.15,73.55 144.15,73.45 MCU_D_A.1@144.2,73.4 ; MCU_D_B.1@144.2,75.3 144.2,75.4 145,76.2 151.9,76.2 152.5,75.6 MCU_SW_A.2@152.5,74.6
NetMCU_D_C_1: MCU_D_C.1 MCU_R_O.1 | length 1.9
  Top Layer w0.2: MCU_D_C.1@121.4,75.2 121.4,74.2 121.692,73.908 122.2,73.908
NetMCU_LED_B_1: MCU_LED_B.1 MCU_LED_R_B.2 | length 3.1
  Top Layer w0.2: MCU_LED_R_B.2@147.4,63.7 148.2,64.5 149.77,64.5 MCU_LED_B.1@150.07,64.2
NetMCU_LED_G_1: MCU_LED_G.1 MCU_LED_R_G.2 | length 1.7
  Top Layer w0.2: MCU_LED_R_G.2@149,64 149,63.7 149.8,62.9 MCU_LED_G.1@150.07,62.9
NetMCU_LED_R_1: MCU_LED_R.1 MCU_LED_R_R.2 | length 1.3
  Top Layer w0.2: MCU_LED_R_R.2@148.908,65.5 MCU_LED_R.1@150.2,65.5
NetMCU_LED_R_Y_2: MCU_LED_R_Y.2 MCU_LED_Y.2 | length 1.3
  Top Layer w0.2: MCU_LED_R_Y.2@151.2,68.1 151.5,67.8 MCU_LED_Y.2@151.5,66.9
NetMCU_R_A_1: MCU_R_A.1 MCU_SW_A.1 | length 1.4
  Top Layer w0.2: MCU_SW_A.1@148.95,69.25 MCU_SW_A.1@149,69.2 ; MCU_SW_A.1@149,75.1 149.4,75.5 MCU_R_A.1@150.192,75.5
NetMCU_U_D_12: MCU_U_D.12 MCU_U_D.13 | length 0.6
  Top Layer w0.15: MCU_U_D.12@126.3,74.4 126.415,74.285 MCU_U_D.13@126.85,74.285
SWCLK: MCU_J_A.68 MCU_J_B.A8 MCU_U_A.49 MCU_U_B.37 | length 49.5
  Top Layer w0.15: v1@118.9,67.8 118.95,67.75 MCU_J_B.A8@120.197,67.75 ; v1@122.3,66.3 v1(122.4,66.3) 122.4,65.9 123,65.3 124.9,65.3 126.1,66.5 126.55,66.5 127.175,65.875 127.625,65.875 v1@127.65,65.9 ; 131.8,64.3 132,64.8 132.325,65.125 MCU_U_B.37@132.85,65.125 ; MCU_U_B.37@132.8,64.8 MCU_U_B.37@132.85,65.125 ; MCU_U_B.37@132.85,64.75 MCU_U_B.37@132.85,65.125
  Top Layer w0.2: v1@130.7,63.5 131.3,62.9 131.8,62.9 ; 131.8,64.3 MCU_U_A.49@131.8,63.65 131.8,62.9 ; v1(133.6,59.7) 133.6,59.9 131.8,61.7 131.8,62.9
  Bottom Layer w0.15: v1@118.75,67.75 v1(118.8,67.7) 120.2,66.3 v1(122.4,66.3) ; v1(127.85,65.85) 130.05,63.65 v1@130.6,63.65
  Bottom Layer w0.2: v1(133.6,59.7) 133.8,59.7 134.014,59.486 154.786,59.486 156.8,61.5 MCU_J_A.68@157.25,61.5
  other v1: 130.6,63.6
SWDIO: MCU_J_A.70 MCU_J_B.B8 MCU_U_A.46 MCU_U_B.34 | length 50.4
  Top Layer w0.15: MCU_J_B.B8@120.197,70.75 121.35,70.75 v1(121.4,70.8) ; v1@121.7,68.9 122.3,68.3 122.3,67.1 122.9,66.5 122.9,65.9 123.2,65.6 124.7,65.6 126,66.9 126.9,66.9 v1@127.4,66.4 ; MCU_U_A.46@129.85,66.6 130.2,66.6 131.05,67.55 MCU_U_B.34@131.35,67.5
  Top Layer w0.2: v1@129,66.6 MCU_U_A.46@129.85,66.6
  Bottom Layer w0.15: v1(121.4,70.8) 121.4,69.4 v1(121.8,69)
  Bottom Layer w0.2: v1@127.35,66.45 128.85,66.45 129,66.6 v1(129,66.45) 129,66.3 132.55,62.75 132.55,61.95 133,61.5 133,59.5 133.367,59.133 154.933,59.133 156.8,61 MCU_J_A.70@157.15,61
  other v1: 127.45,66.4
USB_5_V: MCU_J_B.A4_B9 MCU_J_B.A9_B4 MCU_R_L.2 | length 14.3
  Top Layer w0.3: MCU_J_B.A9_B4@119.7,66.6 118,66.6 118,70.8 118.55,71.35 MCU_J_B.A4_B9@120.197,71.35 ; MCU_J_B.A9_B4@120.3,66.7 120.4,66.6 121.1,66.6 121.1,65.8 121.8,65.1 121.8,64.8 122.8,63.8 MCU_R_L.2@124.392,63.8
USB_DM: MCU_J_A.74 MCU_J_B.A7 MCU_J_B.B7 MCU_R_F.1 | length 50.3
  Top Layer w0.15: MCU_J_B.A7@119.9,68.7 121.3,68.7 ; MCU_J_B.B7@120.197,69.75 121.05,69.75 121.3,69.5 121.3,68.7 ; v1@126.3,66.1 126.3,65.8 125.5,65 122.9,65 122,65.9 121.9,66 121.9,68.1 121.3,68.7
  Top Layer w0.2: v1(125.55,67.15) 125.6,67.15 v1@125.621,67.171 ; MCU_R_F.1@126.4,67.908 MCU_R_F.1@126.3,67.808 ; v1@125.621,67.171 v1@125.65,67.2 ; v1@125.621,67.171 125.65,67.142 v1@125.65,67.2 ; v1@125.65,67.2 125.675,67.225 126.271,67.821 MCU_R_F.1@126.292,67.8 ; MCU_R_F.1@126.292,67.8 MCU_R_F.1@126.392,67.8 126.4,67.8 126.408,67.808 MCU_R_F.1@126.3,67.808 ; MCU_R_F.1@126.292,67.8 MCU_R_F.1@126.3,67.808
  Bottom Layer w0.2: v1(125.55,67.15) 125.55,67.2 v1@125.6,67.25 ; v1@125.7,67.1 125.7,66.6 126.3,66 v1(126.4,66) 126.4,64.2 132.2,58.4 155.2,58.4 156.8,60 157,60
USB_DM_R: MCU_R_F.2 MCU_U_A.44 MCU_U_B.32 | length 3.8
  Top Layer w0.15: MCU_U_A.44@130.2,67.6 MCU_U_B.32@131.05,68.55
  Top Layer w0.2: MCU_R_F.2@127.3,67.6 MCU_U_A.44@129.85,67.6
USB_DP: MCU_J_A.72 MCU_J_B.A6 MCU_J_B.B6 MCU_R_G.1 | length 47.4
  Top Layer w0.15: MCU_J_B.A6@119.7,69.3 119.3,69.3 119.1,69.1 119.1,68.5 119.35,68.25 MCU_J_B.B6@120.197,68.25 121.05,68.25 121.6,67.7 121.6,65.9 122.8,64.7 126.2,64.7 v1@126.8,65.3 ; MCU_R_G.1@126.8,64.9 v1@126.8,65.3 ; v1@126.8,65.4 v1@126.8,65.3 ; v1@126.8,65.6 v1(126.9,65.5) ; v1@127,65.6 v1(126.9,65.5) ; v1@126.8,65.3 126.9,65.4 v1(126.9,65.5)
  Bottom Layer w0.2: v1@127,65.6 127,64.2 132.419,58.781 155.081,58.781 156.8,60.5 MCU_J_A.72@157.15,60.5
USB_DP_R: MCU_R_G.2 MCU_R_H.1 MCU_U_A.45 MCU_U_B.33 | length 6.8
  Top Layer w0.15: MCU_U_A.45@130.2,67.1 MCU_U_B.33@131.05,68.05
  Top Layer w0.2: MCU_R_G.2@126.6,63.8 127.501,64.708 127.71,64.778 MCU_R_H.1@127.8,64.808 ; MCU_R_H.1@127.8,64.8 127.9,64.9 127.9,65.1 128.5,65.7 128.5,67.1 MCU_U_A.45@129.85,67.1
VSSA: CHA_AMP_A.6 CHA_R_G.2 | length 2.4
  Top Layer w0.2: CHA_R_G.2@139,85.77 139,86.5 139.5,87 139.5,87.5 CHA_AMP_A.6@139.365,87.95
pads on no net: CHA_AMP_B.5 CHA_AMP_B.6 CHA_AMP_B.7 CHA_OPTO.3 CHA_OPTO.6 CHA_PSU.8 CHB_AMP_A.6 CHB_AMP_B.5 CHB_AMP_B.6 CHB_AMP_B.7 CHB_OPTO.3 CHB_OPTO.6 CHB_PSU.8 CHB_R_G.2 CHC_AMP_A.6 CHC_AMP_B.5 CHC_AMP_B.6 CHC_AMP_B.7 CHC_OPTO.3 CHC_OPTO.6 CHC_PSU.8 CHC_R_G.2 MCU_J_A.1 MCU_J_A.3 MCU_J_B.M
copper on no net: | length 14.9
  Top Layer w0.1: 143,82.5 148,82.5 ; 176,82.5 181,82.5
  Top Layer w0.15: 158.85,77.8 158.9,77.75
  Top Layer w0.2: 172,85.77 172,86.5 172.5,87 172.5,87.5 172.365,87.95 ; 205,85.77 205,86.5 205.5,87 205.5,87.5 205.365,87.95

## Polygon pours and split planes (outlines as drawn)
MCU_GND on Top Layer "Top Layer-MCU_GND" (solid, remove dead copper, pour order 40): 134.7,80 113.8,80 113.8,58.1 134.7,58.1
CPU_5_V_SW on Top Layer "Top Layer-CPU_5_V_SW" (solid, pour order 36): 155.5,78 134.6,77.1 134.6,79.2 154.5,79.2 155.5,78.2
no net on Top Layer "Top Layer-No Net 2" (solid, pour order 38): 134.7,79.6
no net on Top Layer "Top Layer-No Net" (solid, pour order 22): 153,79.1
no net on Top Layer "Top Layer-No Net 1" (solid, pour order 32): 115.9,71.8
CHC_GND on Bottom Layer "Bottom Layer-CHA_GND" (solid, pour order 74): 209,95.5 209,115 181,115 181,95.5
GND on Bottom Layer "Bottom Layer-GND 1" (solid, pour order 76): 209,82.5 209,89.5 181,89.5 181,82.5
CHB_GND on Bottom Layer "Bottom Layer-CHA_GND" (solid, pour order 72): 176,95.5 176,115 148,115 148,95.5
GND on Bottom Layer "Bottom Layer-GND 1" (solid, pour order 70): 176,82.5 176,89.5 148,89.5 148,82.5
GND on Bottom Layer "Bottom Layer-GND 1" (solid, pour order 56): 143,82.5 143,89.5 115,89.5 115,82.5
CHA_GND on Bottom Layer "Bottom Layer-CHA_GND" (solid, pour order 54): 143,95.5 143,115 115,115 115,95.5
MCU_GND on Bottom Layer "Bottom Layer-GND" (solid, remove dead copper, pour order 24): 113.8,80 113.8,58.1 154.5,58.1 154.5,80

## Other copper
Top Layer:
  region net NetCHC_Q_A_3: 187,105.5 187,110.5 186.5,110.5 186.5,105.5
  region net CHC_VIN_B: 188,111.5 188,114.5 185.5,114.5 185.5,111.5
  region net CHB_VIN_B: 155,111.5 155,114.5 152.5,114.5 152.5,111.5
  region net NetCHB_Q_A_3: 154,105.5 154,110.5 153.5,110.5 153.5,105.5
  region net NetCHA_Q_A_3: 121,105.5 121,110.5 120.5,110.5 120.5,105.5
  region net CHA_VIN_B: 122,111.5 122,114.5 119.5,114.5 119.5,111.5
  region net MCU_GND: 129.9,59.3 128.3,59.3 128.3,58.9 129.9,58.9
  region net MCU_3V3: 129.8,62.5 126.2,62.5 126.2,62.1 129.8,62.1
  region net MCU_5V: 125.7,62.8 124.2,62.8 124.2,60.6 125.7,60.6
  region net MCU_3V3: 140.4,64.3 139.8,64.3 139.8,63.5 140.4,63.5
  region net MCU_3V3: 129.9,65.2 129.5,65.2 129.5,61.5 129.9,61.5
  region net CPU_5_V_SW: 159.8,76.3 157.9,76.3 157.9,75.7 159.8,75.7
  region net NetCHC_Q_A_3: 183.5,105.5 183.5,108 192,108 192,105.5
  region net NetCHC_Q_A_3: 186,108.5 192,108.5 192,110.5 186,110.5
  region net NetCHB_Q_A_3: 153,108.5 159,108.5 159,110.5 153,110.5
  region net NetCHB_Q_A_3: 150.5,105.5 150.5,108 159,108 159,105.5
  region net NetCHA_Q_A_3: 117.5,105.5 117.5,108 126,108 126,105.5
  region net NetCHA_Q_A_3: 120,108.5 126,108.5 126,110.5 120,110.5
  region net CPU_5_V_SW: 155.804,77.697 157.1,76.4 157.4,76.4 157.4,75.7 156.3,75.7 153.2,78.8 153.876,78.8 154.603,78.499 cw(c153.186,75.079)
  region: 151.6,67
  region: 151.4,67.1
  region net MCU_3V3: 141,64.1 139.8,64.1 138.7,65.2 138.7,65.8 138.3,65.8 138.3,66.6 138.8,66.6 139,66.6 139,66.1 139.9,66.1 141,65
  region net MCU_3V3: 136.3,66.5 135.6,65.8 132.6,65.8 131.798,64.998 129.8,64.998 129.8,65.3 130.8,65.3 131.7,66.2 132,66.2 132,66.5
  region net MCU_GND: 138,71.9 138,69.7 136.6,69.7 133.8,66.9 132.3,66.9 132.3,69.2 134.9,69.2 137.6,71.9
  region net MCU_3V3: 138.4,69.5 136.7,69.5 133.8,66.6 138.4,66.6
  region net MCU_3V3: 139,72.3 139,66.5 138.3,66.5 138.3,71.7
  region: 159.7,78.3
  region: 149,71.6
  region: 145.3,71.8
  region: 133.7,73.5
  region: 127.4,73.6
  region: 127.2,73.4
Bottom Layer:
  region net MCU_GND: 138.8,66.4 137.3,66.4 137.3,63.3 138.8,63.3
  region net MCU_GND: 159.7,78.1 157.4,78.1 157.4,76 159.7,76
  region net MCU_GND: 156,78.6 139.2,78.6 139.2,77.7 156,77.7
  region net MCU_PB10: 134.6,70.8
  region net MCU_GND: 135.784,69.9 134.4,69.9 134.4,68.4 139.5,63.3 141,63.3 141,67.2 141,72.1 138.072,72.1
  region net MCU_GND: 155.1,78.5
  region net MCU_GND: 156.3,78.6 156.7,78.2 156.9,78.2 156.9,75.8 155.7,75.8 152.9,78.6

## Silkscreen, mask and mechanical layers (free items; w line width, h text height)
Top Overlay:
  pour cut-out: 139.7,75.8 131.4,75.8 131.4,75.6 cw(c129.3,75.6) 129.3,73.5 129.1,73.5 129.1,65.25 129.15,65.25 cw(c129.15,63) 131.4,63 131.4,62.9 139.7,62.9 139.7,63 cw(c141.9,63) 141.9,65.2 142,65.2 142,73.5 141.8,73.5 cw(c141.8,75.6) 139.7,75.6
  text "JLCJLCJLCJLC" at 116,80 h0.8 r270
  text "B" at 155.8,79.1 h3.3 r180
Bottom Overlay:
  text "B" at 53.9,36.2 h8
Board Outline (M30):
  lines w0.1: 113,56 113,80 113,116 216,116 216,59 216,56 113,56